# Altium PCB PCB5.PcbDoc (part 2 of 2)
Units mm, origin at the board's own origin, x right, y up, seen from the top; angles counter-clockwise.
Board outline 200 x 100 mm, 2 copper layers (Top Layer, Bottom Layer); 155 components, 119 nets, 507 pads, 129 vias.
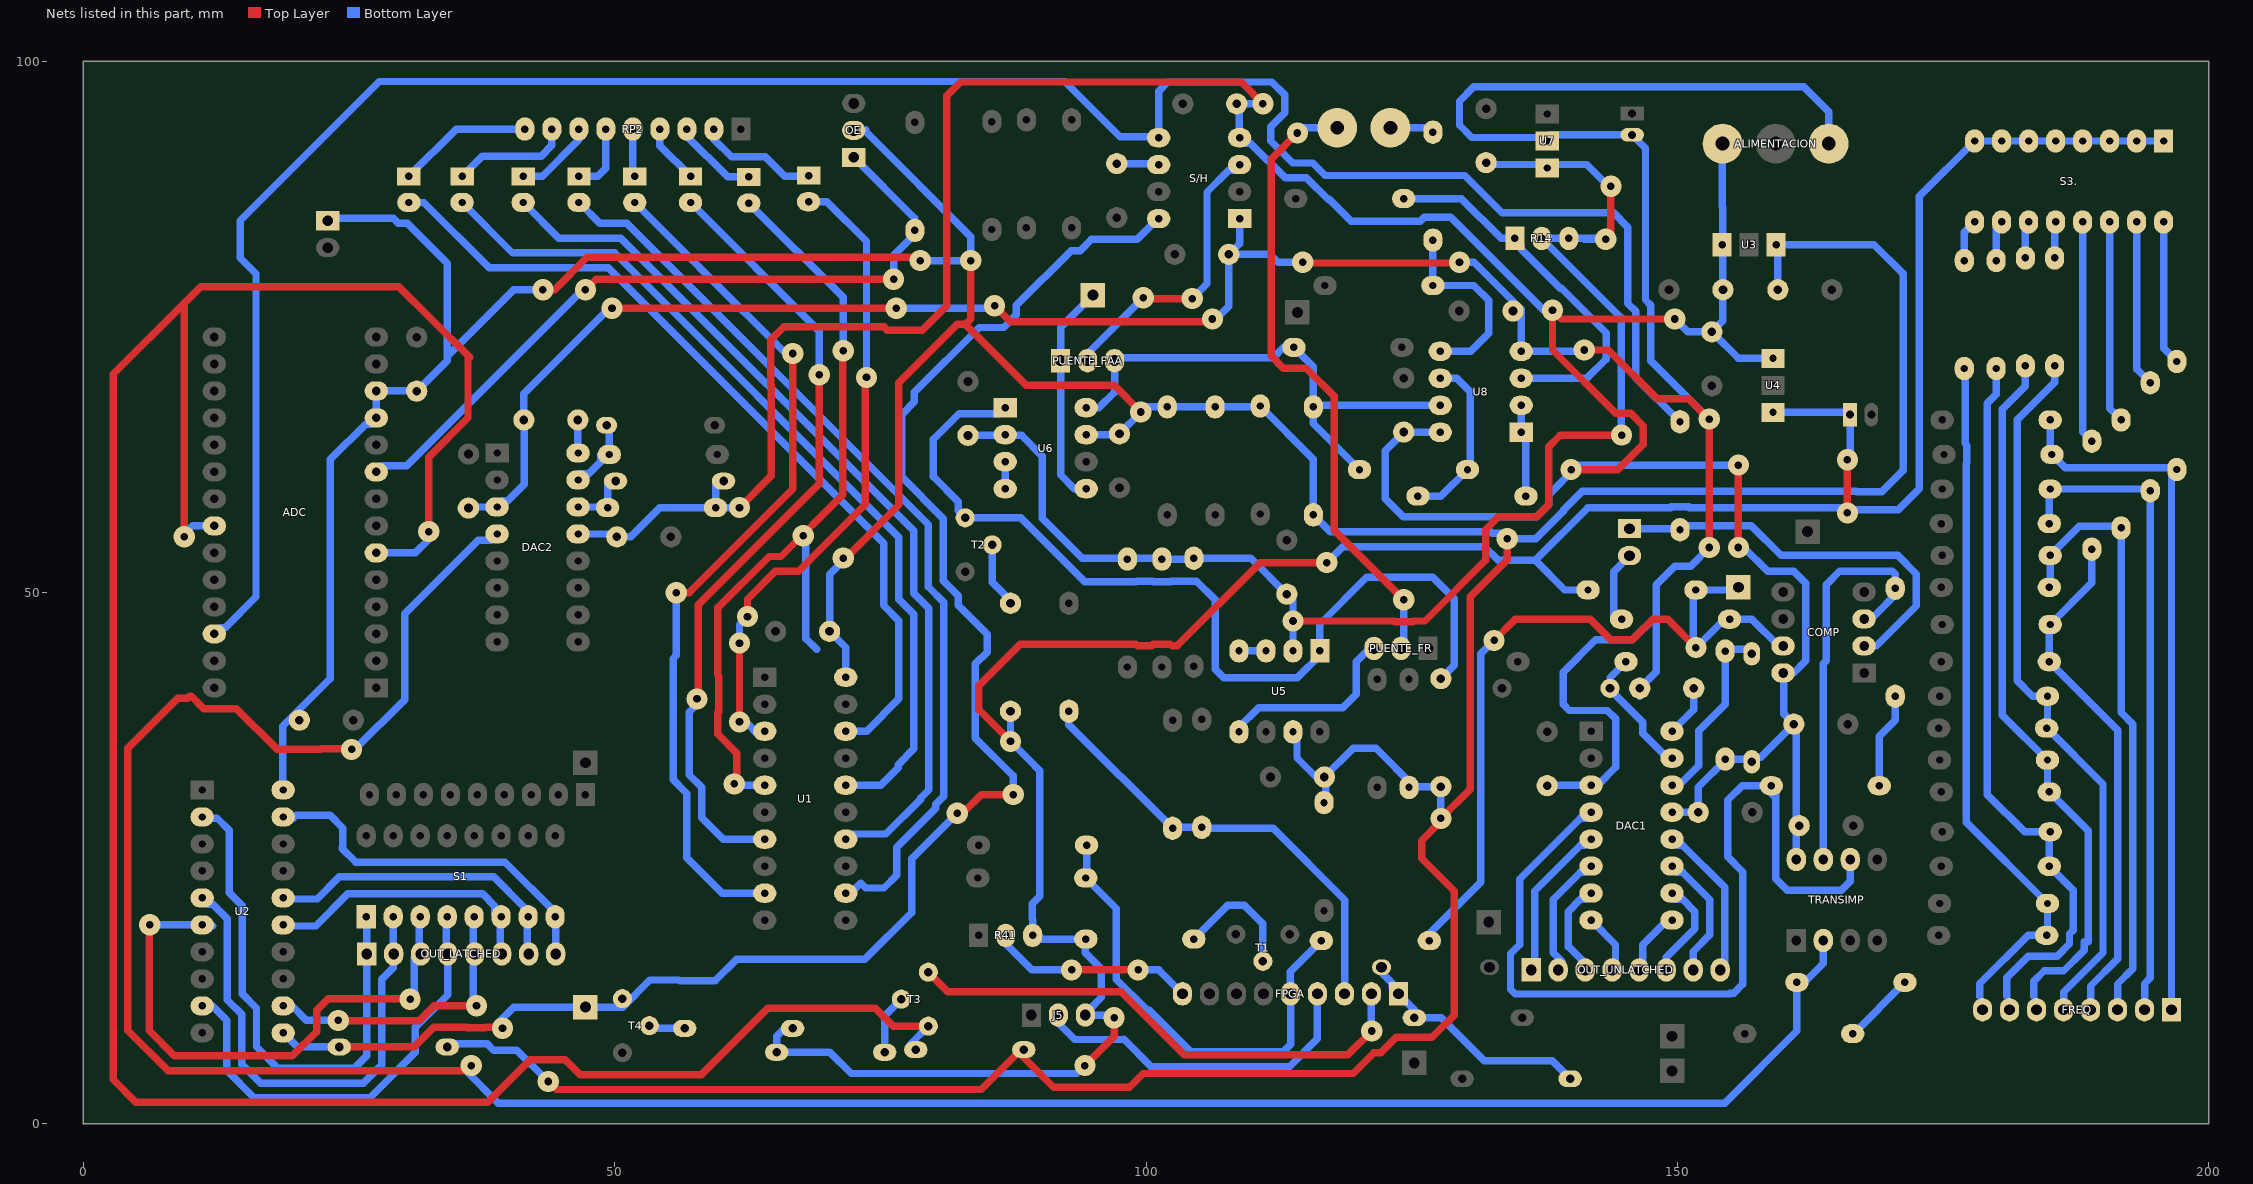
[diagram p2: the nets of this part, all layers, seen from the top]

## Via types
v1: diameter 2, hole 0.711, Top Layer to Bottom Layer, 127 vias
v2: diameter 5, hole 0.711, Top Layer to Bottom Layer, 2 vias

## Nets (pads, with @x,y where several pads share a name; then routed paths per layer and width w, separated by ;. In a path a pad name is that pad's centre, name@x,y a point inside that pad or via, vN(x,y) a via of type N, cw(c..) or ccw(c..) an arc to the next point about the centre after c; other vN are vias at no path point) (continued)
NetC4_2: C4.2 DAC1.16 | length 4.4
  Bottom Layer w0.7: DAC1.16@149.29,37.17 DAC1.16@149.5,36.96 151.54,39 C4.2@151.54,40.25
NetC8_1: C8.1 S/H.6 | length 3.9
  Bottom Layer w0.7: C8.1@97.25,90.37 97.27,90.35 S/H.6@101.19,90.35
NetC10_1: C10.1 DAC2.16 | length 3.1
  Bottom Layer w0.7: C10.1@46.54,66.25 46.54,63.16 DAC2.16@46.56,63.14
NetCOMP_2: COMP.2 R39.2 SCHMITT.1 | length 38.8
  Bottom Layer w0.7: SCHMITT.1@145.5,56.02 R39.2@150.15,56.02 ; R39.2@149.75,56.13 149.92,56.3 156.95,56.3 159.75,53.5 170.73,53.5 172.48,51.75 172.48,48.77 172.5,48.75 168.73,44.98 COMP.2@167.57,44.98
NetCOMP_3: COMP.3 R2.1 TRANSIMP.7 | length 39.8
  Bottom Layer w0.7: TRANSIMP.7@163.73,24.89 163.73,43.302 164.02,43.592 164.02,50.75 164,50.75 165.26,52.01 170.24,52.01 170.5,51.75 R2.1@170.5,50.41 171.08,50.41 171.08,50.372 168.228,47.52 COMP.3@167.57,47.52
NetD1_1: D1.1 U1.18 | length 79.5
  Bottom Layer w0.7: D1.1@30.643,86.714 32.036,86.714 38.186,80.564 49.416,80.564 75.33,54.65 75.33,48.791 76.75,47.371 76.75,40 73.707,36.957 U1.18@71.743,36.957
NetD1_2: D1.2 RP2.9 | length 12.8
  Bottom Layer w0.7: D1.2@30.643,89.178 35.088,93.623 RP2.9@41.553,93.623
NetD2_1: D2.1 U1.16 | length 82.6
  Bottom Layer w0.7: D2.1@35.643,86.714 40.393,81.964 49.996,81.964 76.73,55.23 76.73,49.371 78.15,47.951 78.15,35.3 76.673,33.823 76.673,33.528 75.022,31.877 U1.16@71.743,31.877
NetD2_2: D2.2 RP2.8 | length 11.2
  Bottom Layer w0.7: D2.2@35.643,89.178 37.543,91.078 43.078,91.078 44.093,92.093 RP2.8@44.093,93.623
NetD3_1: D3.1 U1.14 | length 84.6
  Bottom Layer w0.7: D3.1@41.393,86.714 44.743,83.364 50.576,83.364 78.13,55.81 78.13,49.951 79.55,48.531 79.55,31.429 78.8,30.679 78.8,30.575 75.512,27.287 71.743,27.287 U1.14@71.743,26.797
NetD3_2: D3.2 RP2.7 | length 7.7
  Bottom Layer w0.7: D3.2@41.393,89.178 43.208,89.178 46.633,92.603 RP2.7@46.633,93.623
NetD4_1: D4.1 U1.12 | length 86.7
  Bottom Layer w0.7: D4.1@46.643,86.714 48.593,84.764 51.156,84.764 79.53,56.39 79.53,50.531 80.95,49.111 80.95,30.849 80.2,30.099 80.2,29.7 76.543,26.043 76.543,23.408 75.342,22.207 73.644,22.207 73.175,22.675 72.217,21.717 U1.12@71.743,21.717
NetD4_2: D4.2 RP2.6 | length 6.5
  Bottom Layer w0.7: D4.2@46.643,89.178 48.428,89.178 49.173,89.923 RP2.6@49.173,93.623
NetD5_1: D5.1 U1.9 | length 83.4
  Top Layer w0.7: v1(55.8,50) 57,50 66.75,59.75 v1(66.75,72.5)
  Bottom Layer w0.7: D5.1@51.893,86.714 57.323,81.284 57.323,81.274 58.524,80.073 58.534,80.073 66.107,72.5 v1(66.75,72.5) ; v1(55.8,50) 55.8,44.101 55.5,43.801 55.5,32.399 56.8,31.099 56.8,25.051 60.134,21.717 U1.9@64.123,21.717 U1.9@64.123,21.127
NetD5_2: D5.2 RP2.5 | length 4.5
  Bottom Layer w0.7: RP2.5@51.713,93.623 51.713,89.358 D5.2@51.893,89.178
NetD6_1: D6.1 U1.7 | length 76
  Top Layer w0.7: v1(57.75,40) 57.85,40.1 57.85,48.85 69.25,60.25 v1(69.25,70.5)
  Bottom Layer w0.7: D6.1@57.143,86.714 69.25,74.607 v1(69.25,70.5) ; v1(57.75,40) 58.25,40 57,38.75 57,32.879 58.2,31.679 58.2,28.8 60.203,26.797 U1.7@64.123,26.797
NetD6_2: D6.2 RP2.4 | length 5.6
  Bottom Layer w0.7: RP2.4@54.253,93.623 54.253,92.068 D6.2@57.143,89.178
NetD7_1: D7.1 U1.5 | length 78.9
  Top Layer w0.7: v1@61.5,32 61.5,34.899 59.7,36.699 59.7,38.683 59.8,38.783 59.8,42.15 59.7,42.25 59.7,48.563 64.537,53.4 65.65,53.4 71.45,59.2 71.45,72.7 v1(71.5,72.75)
  Bottom Layer w0.7: v1(61.25,32) 61.373,31.877 U1.5@64.123,31.877 ; D7.1@62.393,86.654 D7.1@62.393,86.714 ; D7.1@62.623,86.654 71.5,77.777 v1(71.5,72.75) ; v1(67.75,55.346) 68,55.096 68,45.681 69,44.681
NetD7_2: D7.2 RP2.3 | length 8.1
  Bottom Layer w0.7: RP2.3@56.793,93.623 56.793,92.963 60.638,89.118 D7.2@62.623,89.118
NetD8_1: D8.1 U1.3 | length 61.6
  Top Layer w0.7: v1(61.75,37.834) v1(61.75,45.25) ; v1(62.5,47.75) 62.5,49.383 65.117,52 67.303,52 73.6,58.297 73.6,70.15 v1(73.7,70.25)
  Bottom Layer w0.7: v1(61.75,37.834) 62.332,37.834 63.666,36.5 U1.3@64.123,36.957 ; v1(61.75,45.25) 61.75,47 v1(62.5,47.75) ; D8.1@68.25,86.781 69.969,86.781 73.7,83.05 v1(73.7,70.25)
NetD8_2: D8.2 RP2.2 | length 11
  Bottom Layer w0.7: RP2.2@59.333,93.623 59.333,92.678 60.993,91.018 64.158,91.018 65.998,89.178 D8.2@67.893,89.178
NetD9_2: D9.2 D11.1 PUENTE_FAA.3 R1.2 U6.8 U8.7 | length 49.7
  Bottom Layer w0.7: U6.8@94.37,67.4 95.57,67.4 97.04,68.87 PUENTE_FAA.3@97.04,71.83 97.31,72.1 111.962,72.1 112.942,73.08 D9.2@113.92,73.08 115.75,71.25 D11.1@115.75,67.48 ; R1.2@120.09,61.58 115.75,65.92 D11.1@115.75,67.48 ; U8.7@127.69,67.63 115.9,67.63 D11.1@115.75,67.48
NetDAC1_4: DAC1.4 R3.2 TRANSIMP.6 | length 84
  Bottom Layer w0.7: DAC1.4@141.88,29.34 141.88,28.75 140.872,28.75 135.15,23.028 135.15,16.885 134.3,16.035 134.3,12.68 134.75,12.23 155,12.23 ; 154.925,12.305 155.305,12.305 156.17,13.17 156.17,23.71 154.75,25.13 154.75,30.49 156.09,31.83 158.09,31.83 159.24,30.68 ; R3.2@158.84,31.83 158.84,31.49 159.24,31.09 159.24,30.68 ; TRANSIMP.6@166.27,23.85 166.27,22.85 165.42,22 160.33,22 159.24,23.09 159.24,30.68
NetDAC1_5: DAC1.5 OUT_UNLATCHED.1 | length 14.9
  Bottom Layer w0.7: OUT_UNLATCHED.1@136.59,14.38 136.59,21.928 140.872,26.21 141.29,26.21 DAC1.5@141.88,26.8
NetDAC1_6: DAC1.6 OUT_UNLATCHED.2 | length 11.9
  Bottom Layer w0.7: OUT_UNLATCHED.2@139.13,14.38 139.13,15.325 138.33,16.125 138.33,21.128 140.872,23.67 141.29,23.67 DAC1.6@141.88,24.26
NetDAC1_7: DAC1.7 OUT_UNLATCHED.3 | length 9.3
  Bottom Layer w0.7: OUT_UNLATCHED.3@141.67,14.38 141.67,14.798 139.938,16.53 139.905,16.53 139.75,16.685 139.75,18.332 139.73,18.352 139.73,19.988 140.872,21.13 141.29,21.13 DAC1.7@141.88,21.72
NetDAC1_8: DAC1.8 OUT_UNLATCHED.4 | length 5.8
  Bottom Layer w0.7: DAC1.8@141.88,19.18 144.18,16.88 144.18,14.41 OUT_UNLATCHED.4@144.21,14.38
NetDAC1_9: DAC1.9 OUT_UNLATCHED.5 | length 6.2
  Bottom Layer w0.7: OUT_UNLATCHED.5@146.75,14.38 146.75,16.88 149.05,19.18 DAC1.9@149.5,19.18
NetDAC1_10: DAC1.10 OUT_UNLATCHED.6 | length 9.9
  Bottom Layer w0.7: OUT_UNLATCHED.6@148.95,14.5 148.95,15.672 151.65,18.372 151.65,19.988 150.508,21.13 149.5,21.13 DAC1.10@149.5,21.72 ; OUT_UNLATCHED.6@149.29,14.38 OUT_UNLATCHED.6@149.29,14.5
NetDAC1_11: DAC1.11 OUT_UNLATCHED.7 | length 12.1
  Bottom Layer w0.7: DAC1.11@149.5,24.26 150.09,23.67 150.508,23.67 153.05,21.128 153.05,17.792 151.49,16.232 OUT_UNLATCHED.7@151.49,14.5
NetDAC1_12: DAC1.12 OUT_UNLATCHED.8 | length 14.7
  Bottom Layer w0.7: DAC1.12@149.5,26.8 150.09,26.21 150.508,26.21 154.45,22.268 154.45,14.46 OUT_UNLATCHED.8@154.37,14.38
NetDAC1_14: DAC1.14 R4.1 R57.1 | length 17.6
  Bottom Layer w0.7: DAC1.14@149.5,31.88 150.15,31.88 152,33.73 152,37 154.5,39.5 R4.1@154.5,44.5 154.66,44.66 R57.1@157,44.66
NetDAC1_15: DAC1.15 R5.1 R56.1 | length 12.4
  Bottom Layer w0.7: R5.1@145.16,43.5 143.66,42 R56.1@143.66,41 144.155,40.505 144.155,40.405 146.75,37.811 146.75,36.75 149.08,34.42 DAC1.15@149.5,34.42
NetDAC2_4: DAC2.4 R12.1 TRANSIMP.2 | length 252.5
  Top Layer w0.7: v1(25.25,35.25) 25.2,35.3 22.401,35.3 22.351,35.25 18.25,35.25 14.41,39.09 11.325,39.09 10.183,40.232 10.002,40.232 9.82,40.05 8.901,40.05 4.2,35.349 4.2,8.8 8,5 v1@36.25,5
  Bottom Layer w0.7: v1@24.65,35.5 v1@24.9,35.25 ; v1(25.25,35.25) v1@24.9,35.25 ; v1@36.01,5 39.06,1.95 154.45,1.95 161.25,8.75 R12.1@161.25,13.33 161.96,13.33 163.73,15.1 TRANSIMP.2@163.73,17.27 ; DAC2.4@38.94,55.52 38.35,54.93 37.18,54.93 30.25,48 30.25,39.938 25.562,35.25 v1@24.9,35.25
  other v1: 36.5,5.5
NetDAC2_14: DAC2.14 R10.2 R55.2 | length 5.8
  Bottom Layer w0.7: DAC2.14@46.56,58.06 R10.2@49.34,58.06 ; R10.2@49.34,58 R10.2@49.34,58.06 ; R55.2@49.5,60.5 49.34,60.34 R10.2@49.34,58.06 ; R10.2@49.78,58.06 R10.2@49.34,58.06
NetDAC2_15: DAC2.15 R11.2 R54.2 | length 7.4
  Bottom Layer w0.7: DAC2.15@46.56,60.6 46.56,61.06 46.69,61.19 47.568,61.19 48.71,62.332 48.71,63 R11.2@49.5,63 49.5,65.5 R54.2@49.25,65.75
NetDZ2_2: DZ2.2 FREQ.5 R23.2 R28.2 | length 67.7
  Bottom Layer w0.7: DZ2.2@184.75,37.25 184.788,37.25 190.05,31.988 190.05,16.132 186.34,12.422 FREQ.5@186.34,10.75 ; DZ2.2@184.83,37.33 R28.2@184.83,40.25 183.42,40.25 181.97,41.7 181.97,66.25 185.5,69.78 R23.2@185.5,71.34
NetDZ3_2: DZ3.2 FREQ.2 R20.2 R29.2 | length 62.2
  Bottom Layer w0.7: DZ3.2@185,56.5 185,59.67 R29.2@185.08,59.67 ; R29.2@185.08,59.75 R20.2@195,59.75 ; FREQ.2@193.96,10.75 193.96,13.21 194.5,13.75 R20.2@194.5,59.59
NetDZ4_2: DZ4.2 FREQ.6 R24.2 R30.2 | length 66.7
  Bottom Layer w0.7: R24.2@182.75,71.34 182.75,69.43 180.57,67.25 180.57,38.472 184.792,34.25 R30.2@184.83,34.25 184.83,31.42 DZ4.2@185,31.25 188.65,27.6 188.65,17.15 ; 183.55,12 183.55,13.45 184.5,14.4 186.338,14.4 188.3,16.362 188.3,17.15
NetDZ5_2: DZ5.2 FREQ.3 R21.2 R31.2 | length 57.1
  Bottom Layer w0.7: DZ5.2@185.08,50.58 R31.2@185.08,53.5 187.82,56.24 R21.2@191.75,56.24 ; FREQ.3@191.42,10.75 191.42,13.17 192.85,14.6 192.85,37.63 191.75,38.73 R21.2@191.75,56.09
NetDZ6_2: DZ6.2 FREQ.7 R25.2 R32.2 | length 68.3
  Bottom Layer w0.7: R25.2@180,71.09 180,68.66 179.17,67.83 179.17,31 182.67,27.5 R32.2@185.08,27.5 ; 181.01,12 181.01,13.78 183.03,15.8 185.758,15.8 186.9,16.942 186.9,17.9 187.25,18.25 187.25,22 DZ6.2@185,24.25 R32.2@185,27.42
NetDZ7_2: DZ7.2 FREQ.4 R22.2 R33.2 | length 48.6
  Bottom Layer w0.7: R33.2@185,46.92 DZ7.2@185,43.5 191.45,37.05 191.45,15.553 188.88,12.983 FREQ.4@188.88,10.75 ; R33.2@185.08,47 189,50.92 R22.2@189,54.09
NetDZ8_2: DZ8.2 FREQ.1 R19.2 R27.2 | length 66.5
  Bottom Layer w0.7: R27.2@185.08,66.25 185.08,63.17 DZ8.2@185.25,63 186.5,61.75 R19.2@196.91,61.75 ; FREQ.1@196.5,10.75 196.5,61.09 R19.2@197,61.59
NetDZ9_2: DZ9.2 FREQ.8 R26.2 R34.2 | length 66
  Bottom Layer w0.7: R26.2@177,71.09 177.07,71.09 177.07,64.048 177.24,63.878 177.24,62.192 177.17,62.122 177.17,28.41 R34.2@184.83,20.75 DZ9.2@184.83,17.83 ; 178.47,12 178.47,13.22 183,17.75 DZ9.2@184.75,17.75
NetDZ12_2: DZ12.2 FPGA.3 R37.1 R38.2 | length 43.1
  Bottom Layer w0.7: R38.2@92.75,38.84 92.75,37.58 R37.1@102.5,27.83 ; R37.1@102.835,28.165 103.08,27.92 DZ12.2@105.25,27.92 ; DZ12.2@105.25,27.83 111.958,27.83 118.71,21.078 FPGA.3@118.71,11.83
NetDZ13_2: DZ13.2 FPGA.5 R42.2 R43.2 | length 45.4
  Bottom Layer w0.7: DZ13.2@94.33,23.15 97.2,20.28 97.2,13.599 100.099,10.7 100.3,10.7 104.2,6.8 112.92,6.8 113.63,7.51 113.63,13.37 ; DZ13.2@94.41,23.23 R43.2@94.41,26.25 ; FPGA.5@113.59,12.25 113.59,14.34 R42.2@116.5,17.25
NetDZ14_2: DZ14.2 FPGA.1 R50.1 R51.2 | length 23.1
  Bottom Layer w0.7: DZ14.2@122.17,14.75 122.17,14.248 123.16,13.258 123.16,12.84 FPGA.1@123.75,12.25 125.25,10.75 R50.1@125.25,10 127.77,10 131.82,5.95 138.21,5.95 R51.2@139.91,4.25
NetFOUT_1: FOUT.1 PUENTE_FAA.1 U6.5 | length 21.1
  Bottom Layer w0.7: U6.5@94.37,59.78 93.25,59.78 91.96,61.07 PUENTE_FAA.1@91.96,71.83 91.96,74.96 FOUT.1@95,78
NetFPGA_2: FPGA.2 T3.3 | length 48.8
  Top Layer w0.7: T3.3@79.52,14.29 81.36,12.45 97.651,12.45 103.601,6.5 119,6.5 v1(121.25,8.75)
  Bottom Layer w0.7: v1@121.21,9.29 FPGA.2@121.21,12.25
NetFPGA_4: FPGA.4 J5.2 | length 32.2
  Bottom Layer w0.7: J5.2@91.75,10.25 91.75,9.5 93.3,7.95 97.849,7.95 97.899,8 100.499,5.4 113.5,5.4 116.13,8.03 FPGA.4@116.13,12.25
NetFPGA_9: FPGA.9 R41.2 | length 19.4
  Top Layer w0.7: v1(93,14.5) v1(99.25,14.5)
  Bottom Layer w0.7: R41.2@86.79,17.75 86.79,16.96 89.25,14.5 v1(93,14.5) ; v1(99.25,14.5) 101.18,14.5 102.93,12.75 FPGA.9@103.43,12.25
NetIO_1: IO.1 R44.1 | length 4.2
  Bottom Layer w0.7: IO.1@123,93.75 126.58,93.75 R44.1@127,93.33
NetIO_2: IO.2 PUENTE_FR.2 | length 59.3
  Top Layer w0.7: v1(114.25,93.25) 111.77,90.77 111.77,72.272 112.912,71.13 115.058,71.13 117.7,68.488 117.7,55.88 v1(124.25,49.33)
  Bottom Layer w0.7: v1(114.25,93.25) 114.75,93.75 IO.2@118,93.75 ; PUENTE_FR.2@124.25,45.4 v1(124.25,49.33)
NetOUT_LATCHED_1: OUT_LATCHED.1 S1.1 U2.2 | length 49.1
  Bottom Layer w0.7: U2.2@12.163,28.79 12.581,28.79 13.733,27.638 13.733,24.58 13.75,24.563 13.75,21.758 14.963,20.545 14.963,12.247 16.3,10.91 16.3,7.25 18.3,5.25 25.5,5.25 26.673,6.423 26.673,19.95 S1.1@26.373,20.25
NetOUT_LATCHED_2: OUT_LATCHED.2 S1.2 U2.5 | length 46.7
  Bottom Layer w0.7: U2.5@11.19,21.27 11.78,20.68 12.198,20.68 13.563,19.315 13.563,11.667 14.9,10.33 14.9,5.633 16.683,3.85 26.35,3.85 28.073,5.573 28.073,13.623 29.163,14.713 S1.2@29.163,19.5 ; S1.2@28.95,19.5 28.95,19.627 S1.2@29.073,19.75
NetOUT_LATCHED_3: OUT_LATCHED.3 S1.3 U2.6 | length 53.5
  Top Layer w0.7: v1(6.25,18.75) 6.2,18.7 6.2,8.8 8.577,6.423 19.673,6.423 21.95,8.7 21.95,10.7 23.05,11.8 30.7,11.8 v1(30.75,11.75)
  Bottom Layer w0.7: v1(6.25,18.75) 12.043,18.75 U2.6@12.163,18.63 ; v1(30.75,11.75) 30.75,11.826 31.25,12.326 31.163,12.413 31.163,15.67 OUT_LATCHED.3@31.623,16.13 ; S1.3@31.613,19.75 31.613,16.14 OUT_LATCHED.3@31.623,16.13 ; OUT_LATCHED.3@31.753,16 OUT_LATCHED.3@31.623,16.13
NetOUT_LATCHED_4: OUT_LATCHED.4 S1.4 U2.9 | length 42.8
  Bottom Layer w0.7: U2.9@11.19,11.11 12.14,11.11 13.5,9.75 13.5,5.053 16.103,2.45 26.95,2.45 31.25,6.75 31.25,9.097 34.293,12.14 OUT_LATCHED.4@34.293,16 ; S1.4@33.873,20 34.153,19.72 OUT_LATCHED.4@34.153,16
NetOUT_LATCHED_5: OUT_LATCHED.5 S1.5 U2.12 | length 28.5
  Top Layer w0.7: v1(24,9.75) 24.05,9.7 31.599,9.7 33.026,11.127 v1(37,11.127)
  Bottom Layer w0.7: U2.12@18.81,11.11 19.64,11.11 21,9.75 v1(24,9.75) ; S1.5@36.693,20 36.693,11.32 36.75,11.377 v1(37,11.127)
NetOUT_LATCHED_6: OUT_LATCHED.6 S1.6 U2.15 | length 25.6
  Bottom Layer w0.7: U2.15@19.783,18.63 21.88,18.63 24.9,21.65 37.591,21.65 38.733,20.508 38.733,19.75 S1.6@39.073,19.75 ; S1.6@39.233,19.75 39.233,16.14 OUT_LATCHED.6@39.373,16
NetOUT_LATCHED_7: OUT_LATCHED.7 S1.7 U2.16 | length 29
  Bottom Layer w0.7: U2.16@19.783,21.17 22.023,21.17 24.103,23.25 38.623,23.25 41.613,20.26 S1.7@41.613,19.75 ; S1.7@41.763,19 S1.7@41.763,19.75 ; S1.7@41.773,19.75 41.773,16.14 OUT_LATCHED.7@41.913,16
NetOUT_LATCHED_8: OUT_LATCHED.8 S1.8 U2.19 | length 33.7
  Bottom Layer w0.7: U2.19@19.783,28.79 20.043,29.05 23.222,29.05 24.423,27.849 24.423,26.101 24.373,26.051 24.373,25.9 25.623,24.65 39.671,24.65 44.453,19.868 OUT_LATCHED.8@44.453,16
NetPUENTE_FR_3: PUENTE_FR.3 U5.5 | length 18.5
  Bottom Layer w0.7: U5.5@108.75,36.9 108.75,37.318 110.612,39.18 118.53,39.18 119.8,40.45 119.8,43.49 PUENTE_FR.3@121.71,45.4
NetR1_1: R1.1 R15.2 U8.6 | length 16.5
  Bottom Layer w0.7: R15.2@125.59,59.08 127.75,59.08 R1.1@130.25,61.58 130.5,61.83 130.5,68.9 129.23,70.17 U8.6@127.69,70.17
NetR2_2: R2.2 R3.1 | length 9
  Bottom Layer w0.7: R3.1@169,31.83 169,36.5 170.5,38 R2.2@170.5,40.25
NetR12_2: R12.2 R13.1 | length 6.9
  Bottom Layer w0.7: R13.1@166.5,8.5 166.58,8.5 R12.2@171.41,13.33
NetR14_1: R14.1 R16.1 U8.3 | length 35.8
  Bottom Layer w0.7: R16.1@124.25,86.9 124.43,87.08 129.67,87.08 133.42,83.33 R14.1@134.71,83.33 134.71,83.12 135.3,82.53 135.3,82.322 138.992,78.63 139.099,78.63 143.3,74.429 143.3,71.981 141.489,70.17 U8.3@135.31,70.17
NetR15_1: R15.1 U8.1 U8.2 | length 8.7
  Bottom Layer w0.7: U8.2@135.31,67.63 U8.1@135.31,65.09 135.75,64.65 R15.1@135.75,59.08
NetR17_1: R17.1 T1.1 | length 12.1
  Bottom Layer w0.7: R17.1@104.5,17.4 107.68,20.58 109.25,20.58 111,18.83 T1.1@111,15.31
NetR19_1: R19.1 S3..16 | length 13.6
  Bottom Layer w0.7: S3..16@195.75,84.88 195.75,73 R19.1@197,71.75
NetR20_1: R20.1 S3..15 | length 15.7
  Bottom Layer w0.7: S3..15@193.21,84.88 193.21,71.04 R20.1@194.5,69.75
NetR21_1: R21.1 S3..14 | length 19.1
  Bottom Layer w0.7: S3..14@190.67,84.88 190.67,67.33 R21.1@191.75,66.25
NetR22_1: R22.1 S3..13 | length 21
  Bottom Layer w0.7: S3..13@188.13,84.88 188.13,65.12 R22.1@189,64.25
NetR23_1: R23.1 S3..12 | length 3.3
  Bottom Layer w0.7: R23.1@185.5,81.5 S3..12@185.5,84.79
NetR24_1: R24.1 S3..11 | length 3.5
  Bottom Layer w0.7: R24.1@182.75,81.5 182.75,84.58 S3..11@183.05,84.88
NetR25_1: R25.1 S3..10 | length 3.8
  Bottom Layer w0.7: R25.1@180,81.25 180,84.37 S3..10@180.51,84.88
NetR26_1: R26.1 S3..9 | length 4
  Bottom Layer w0.7: R26.1@177,81.25 177,83.91 S3..9@177.97,84.88
NetR40_1: R40.1 SCHMITT.2 | length 6.5
  Bottom Layer w0.7: R40.1@144,47.58 144,51.98 SCHMITT.2@145.5,53.48
NetR44_2: R44.2 R45.1 U8.5 | length 18.5
  Bottom Layer w0.7: R44.2@127,83.17 R45.1@127,78.9 130.859,78.9 132.26,77.499 132.26,74.41 130.56,72.71 U8.5@127.69,72.71
NetR46_1: R46.1 T2.1 | length 6.7
  Bottom Layer w0.7: T2.1@85.52,54.5 85.52,50.98 R46.1@87.75,48.75
NetR47_2: R47.2 T2.2 U5.1 U6.1 | length 87.4
  Bottom Layer w0.7: U6.1@86.75,67.4 86.16,66.81 86.16,66.84 82.401,66.84 80,64.439 80,60.9 82.33,58.57 82.33,57.69 T2.2@82.98,57.04 88.21,57.04 94.24,51.01 99.058,51.01 99.128,51.08 100.622,51.08 100.692,51.01 102.308,51.01 102.378,51.08 104.75,51.08 106.5,49.33 106.5,42.81 107.33,41.98 114.248,41.98 116.37,44.102 U5.1@116.37,44.52 116.37,47.05 120.75,51.43 127,51.43 129,49.43 129,43.16 R47.2@127.75,41.91
NetR49_2: R49.2 T3.1 | length 5.9
  Bottom Layer w0.7: R49.2@75.41,6.5 R49.2@75.41,6.75 75.41,10.18 T3.1@76.98,11.75
NetR52_2: R52.2 T4.1 | length 3.4
  Bottom Layer w0.7: T4.1@53.27,9 56.34,9 R52.2@56.59,8.75
NetU5_3: U5.3 U5.4 | length 2.5
  Bottom Layer w0.7: U5.4@108.75,44.52 U5.3@111.29,44.52
NetU6_3: U6.3 U6.4 | length 2.5
  Bottom Layer w0.7: U6.4@86.75,59.78 U6.3@86.75,62.32
OE_ADC: ADC.9 OE.1 R9.2 | length 70.8
  Top Layer w0.7: v1(47.25,78.5) 48.25,79.5 v1(76.25,79.5)
  Bottom Layer w0.7: ADC.9@27.573,61.36 28.163,61.95 30.45,61.95 47,78.5 v1(47.25,78.5) ; OE.1@72.5,90.96 78.25,85.21 R9.2@78.25,84.09 ; v1(76.25,79.5) 76.25,81.75 R9.2@78.42,83.92
OUT_COMP: COMP.7 OUTCMP.1 R6.1 R40.2 R42.1 | length 74
  Top Layer w0.7: v1(132.75,45.5) 134.75,47.5 141.792,47.5 143.742,45.55 145.758,45.55 147.708,47.5 149.08,47.5 v1(151.75,44.83)
  Bottom Layer w0.7: R42.1@126.66,17 126.66,17.91 131.5,22.75 131.5,44.25 v1(132.75,45.5) ; R40.2@154.16,47.58 154.16,47.24 v1(151.75,44.83) 151.5,45.08 151.5,50 R6.1@151.75,50.25 155.5,50.25 OUTCMP.1@155.75,50.5 ; R40.2@154.25,47.22 154.16,47.13 R40.2@154.91,47.13 ; R40.2@154.91,47.5 157.012,47.5 159.532,44.98 COMP.7@159.95,44.98
SH_CONTROL: R53.2 S/H.8 SHCTRL.1 T4.2 U2.11 | length 155.5
  Top Layer w0.7: R53.2@23.59,7.25 31.152,7.25 32.989,9.087 36.14,9.087 36.151,9.077 37.849,9.077 37.86,9.087 39.363,9.087 v1(39.45,9) ; v1@83,29.5 84.5,31 v1(87.5,31)
  Bottom Layer w0.7: U2.11@18.81,8.57 20.13,7.25 R53.2@23.59,7.25 ; v1@39,9.5 40.5,11 50.75,11 53.3,13.55 56.099,13.55 56.149,13.5 59.477,13.5 61.477,15.5 73.545,15.5 77.943,19.898 77.943,24.943 v1(82.25,29.25) ; v1(87.5,31) 87.5,32.75 83.95,36.3 83.95,43.301 85.05,44.401 85.05,46.099 82.35,48.799 82.35,49.691 80.93,51.111 80.93,56.97 77,60.9 77,66.75 78.2,67.95 78.2,68.849 84.301,74.95 86.599,74.95 87.8,76.151 87.8,77.03 92.95,82.18 93.808,82.18 94.868,83.24 99.16,83.24 S/H.8@101.19,85.27
SH_IN: PUENTE_FAA.2 S/H.3 | length 27.5
  Top Layer w0.7: v1(99.75,77.75) 99.832,77.668 v1(104.35,77.668)
  Bottom Layer w0.7: PUENTE_FAA.2@94.5,71.83 94.5,72.5 v1(99.75,77.75) ; v1(104.35,77.668) 105.74,79.058 105.74,87.698 107.802,89.76 108.22,89.76 S/H.3@108.81,90.35
SH_OUT: ADC.26 R39.1 S/H.5 | length 214.8
  Bottom Layer w0.7: ADC.26@12.163,46.12 ADC.26@12.333,46.12 12.923,46.71 13.341,46.71 16.25,49.619 16.25,80 14.75,81.5 14.75,85 27.85,98.1 92.348,98.1 97.558,92.89 101.19,92.89 101.19,97.19 102.05,98.05 111.849,98.05 113.05,96.849 113.05,95.151 111.75,93.851 111.75,92.5 113.82,90.43 115.678,90.43 116.858,89.25 130,89.25 133.5,85.75 144,85.75 145.35,84.4 145.35,77.21 146.1,76.46 146.1,70.23 R39.1@150.25,66.08
START_FPGA: ADC.6 ADC.22 R48.2 T3.2 | length 241.9
  Top Layer w0.7: v1(9.5,55.25) 9.5,77.25 ; v1@32.5,55.25 v1(32.5,55.75) 32.5,62.75 36.2,66.45 36.2,72 36.35,72.15 32.75,75.75 29.7,78.8 11.05,78.8 9.5,77.25 ; T3.2@79.52,9.21 76.207,9.21 74.517,10.9 64.4,10.9 58.148,4.648 46.75,4.648 45.348,6.05 42.05,6.05 38.05,2.05 4.95,2.05 2.8,4.2 2.8,70.55 9.5,77.25
  Bottom Layer w0.7: v1@9.75,55.75 10.28,56.28 ADC.22@12.333,56.28 ; ADC.6@27.573,53.74 31.24,53.74 32.5,55 v1(32.5,55.75) ; R48.2@77.84,6.75 77.84,7.53 T3.2@79.52,9.21
VCC_3.3: C18.1 J5.3 R6.2 R17.2 R41.3 R46.2 R49.1 R52.1 S3..1 S3..2 S3..3 S3..4 S3..5 S3..6 S3..7 S3..8 U4.3 | length 257.2
  Top Layer w0.7: v1(87.25,36) 84.25,39 84.25,41.25 88.15,45.15 99.058,45.15 99.208,45 100.542,45 100.692,45.15 102.308,45.15 102.458,45 102.92,45 110.75,52.83 v1(117,52.83) ; v1(94.25,5.5) 97,8.25 v1(97,10) ; v1(166,57.5) v1(166,62.5)
  Bottom Layer w0.7: R52.1@66.75,9 66,9 65.25,8.25 R49.1@65.25,6.75 70.25,6.75 72.25,4.75 93.5,4.75 v1(94.25,5.5) ; R46.2@87.25,38.84 v1(87.25,36) 89,34.25 ; 89,34.25 90,33.25 90,21.42 89.29,20.71 89.29,19.25 89.33,19.21 R41.3@89.33,17.75 89.9,17.75 90.25,17.4 R17.2@94.34,17.4 94.29,17.35 94.29,16.109 95.8,14.599 95.8,11.901 94.599,10.7 J5.3@94.29,10.7 ; J5.3@94.29,10.25 96.75,10.25 v1(97,10) ; v1(117,52.83) 118.5,54.33 131.851,54.33 133.151,53.03 136.618,53.03 ; R6.2@141.59,50.25 139.398,50.25 136.618,53.03 ; U4.3@159,66.96 C18.1@166.04,66.96 ; v1(166,57.5) 166.3,57.8 170.8,57.8 172.77,59.77 172.77,87.3 S3..8@177.97,92.5 S3..7@180.51,92.5 S3..6@183.05,92.5 S3..5@185.59,92.5 S3..4@188.13,92.5 S3..3@190.67,92.5 S3..2@193.21,92.5 S3..1@195.75,92.5 ; v1@166,58 151.128,58 151.058,58.07 149.442,58.07 149.372,58 141.588,58 136.618,53.03 ; v1(166,62.5) 166.25,62.75 C18.1@166.25,66.75
VCC_5: ADC.11 ADC.12 C14.1 C16.1 C17.2 C24.1 C25.2 C26.1 D11.2 D12.2 D13.2 DZ10.2 FPGA_ALIM.1 OE.2 R18.2 R35.2 R47.1 R48.1 R53.1 U1.20 U2.20 U3.3 U5.7 U6.7 | length 508.9
  Top Layer w0.7: v1(43.25,78.5) 44.351,78.5 47.401,81.55 78.599,81.55 v1@79.149,81 ; v1(43.75,4) 44.502,3.248 84.498,3.248 88,6.75 91.3,3.45 98.45,3.45 99.75,4.75 119.5,4.75 121.45,6.7 122.099,6.7 123.562,8.163 126.913,8.163 129,10.25 129,21.921 125.94,24.981 125.94,26.679 127.75,28.489 v1(127.75,28.75) 130.5,31.5 130.5,49.6 134,53.1 v1(134,55.08) ; v1(71.5,53.25) 71.75,53.25 76.75,58.25 76.75,69.75 82.25,75.25 83,75.25 ; v1(83.5,81.25) 83.5,75.75 83,75.25 ; v1(99.5,67) 97,69.5 88.75,69.5 83,75.25
  Bottom Layer w0.7: 18.75,32.363 18.75,37.417 23.25,41.917 23.25,62.535 26.565,65.85 26.983,65.85 ADC.11@27.573,66.44 ADC.12@27.573,68.98 C24.1@31.353,68.98 ; FPGA_ALIM.1@23,85.25 29.149,85.25 29.635,84.764 30.486,84.764 34.25,81 34.25,72.25 ; C24.1@31.373,68.96 34.25,71.837 34.25,72.25 ; R53.1@33.75,7.25 33.75,7.52 33.78,7.55 38.001,7.55 38.601,6.95 40.8,6.95 v1(43.75,4) ; v1@44,78.5 v1(43.25,78.5) 40.5,78.5 34.25,72.25 ; v1(71.5,53.25) 71.5,53 70.223,51.723 C26.1@70.223,46.357 71.743,44.837 U1.20@71.743,42.037 ; 73.65,93.545 73.65,93.35 83.5,83.5 v1(83.5,81.25) v1(78.75,81.25) ; U6.7@94.37,64.86 C16.1@97.5,64.86 ; C16.1@97.5,64.94 v1@99.53,66.97 ; v1@100.04,67.48 D13.2@102,67.48 DZ10.2@106.5,67.48 110.67,67.48 R35.2@110.75,67.56 115.75,62.56 D11.2@115.75,57.32 117.34,55.73 132.431,55.73 132.581,55.58 133.5,55.58 v1(134,55.08) 136.688,55.08 139.3,57.692 139.3,57.8 141.05,59.55 166.849,59.55 166.899,59.5 169.25,59.5 171.25,61.5 171.25,80 168.5,82.75 U3.3@159.29,82.75 159.46,82.58 C14.1@159.46,78.5 ; U5.7@113.83,36.9 114.21,36.52 114.21,34.44 116,32.65 C17.2@116.79,32.65 ; R18.2@116.91,30.08 116.91,32.53 C17.2@116.79,32.65 ; v1(127.75,28.75) R47.1@127.75,31.75 125.25,31.75 121.64,35.36 119.5,35.36 C17.2@116.79,32.65
VCC_10: ALIMENTACION.3 C1.1 C3.2 C5.1 C7.1 C9.1 C11.2 C13.1 C15.1 COMP.8 DAC1.13 DAC2.13 R4.2 R10.1 R55.1 R57.2 S/H.4 TRANSIMP.8 U3.1 U4.1 U8.8 | length 319.5
  Top Layer w0.7: v1(61.75,58) 64.75,61 64.75,69.5 64.7,69.55 64.7,73.8 65.9,75 75.351,75 75.651,74.7 78.95,74.7 81.25,77 81.25,96.75 82.55,98.05 108.95,98.05 v1(111,96) ; v1(140,61.58) 144.399,61.58 146.8,63.981 146.8,65.679 145.599,66.88 144.2,66.88 138.25,72.83 v1(138.25,76.58) 139.08,75.75 v1(149.75,75.75) ; v1(155.75,54.25) v1(155.75,62)
  Bottom Layer w0.7: DAC2.13@46.56,55.52 C11.2@49.94,55.52 ; C11.2@50.21,55.25 51.5,55.25 54.25,58 R10.1@59.5,58 ; R55.1@59.66,60.5 59.5,60.34 R10.1@59.5,58 ; v1(61.75,58) R10.1@59.5,58 ; C7.1@108.54,96 C7.1@108.79,96 ; v1(111,96) C7.1@108.79,96 ; U8.8@127.67,65.11 C9.1@124.25,65.11 122.5,63.36 122.5,58.83 124.2,57.13 136.758,57.13 137.9,58.272 137.9,59.23 v1@140.35,61.68 ; v1(138.25,76.58) 137.42,76.58 128.68,85.32 126.192,85.32 125.802,84.93 119.32,84.93 117.25,87 117.128,87 115.098,89.03 113.088,89.03 109.818,92.3 109.4,92.3 108.81,92.89 108.79,92.91 C7.1@108.79,96 ; v1(140,61.58) 140.42,62 v1(155.75,62) ; DAC1.13@149.5,29.34 151.95,29.34 151.96,29.35 151.96,31.71 R4.2@154.59,34.34 ; v1(149.75,75.75) 150.96,74.54 C15.1@153.25,74.54 ; ALIMENTACION.3@154.21,92.25 154.21,86.33 154.29,86.25 C13.1@154.29,78.5 154.29,75.58 C15.1@153.25,74.54 ; R4.2@154.5,34.34 R4.2@154.59,34.34 ; v1(155.75,54.25) 156.25,54.25 158.49,52.01 160.958,52.01 162.1,50.868 162.1,43.6 160.94,42.44 COMP.8@160,42.44 ; U4.1@159,72.04 155.75,72.04 C15.1@153.25,74.54 ; COMP.8@159.95,42.44 COMP.8@160,42.44 ; C1.1@160.92,37.67 160,38.59 COMP.8@160,42.44 ; TRANSIMP.8@161.19,24.89 161.19,37.4 C1.1@160.96,37.63 157.83,34.5 157,34.5 156.84,34.34 R4.2@154.59,34.34
VEE_5: C19.1 C20.1 C23.1 D14.1 DZ11.1 R14.2 R14.3 R36.2 U5.2 U6.2 U7.3 | length 136.7
  Top Layer w0.7: v1(113.83,47.33) 123.351,47.33 123.401,47.28 125.099,47.28 125.149,47.33 126.25,47.33 131.95,53.03 131.95,55.929 133.151,57.13 134.849,57.13 136.758,57.13 137.9,58.272 137.9,63.73 139,64.83 v1(144.75,64.83) ; v1(143.25,83.25) 143.75,83.75 v1(143.75,88.25)
  Bottom Layer w0.7: C20.1@83.25,64.79 88.29,64.79 90.25,62.83 90.25,57 94.02,53.23 101.75,53.23 101.83,53.15 105.25,53.15 105.33,53.23 109.88,53.23 C19.1@113.25,49.86 113.83,49.28 v1(113.83,47.33) U5.2@113.83,44.52 ; C23.1@131.75,90.29 137.75,90.29 141.46,90.29 v1@143.625,88.125 ; R14.2@137,83.08 137.5,83.08 144.7,75.88 144.7,64.88 v1(144.75,64.83) v1@145.25,64.33 ; R14.2@137.25,83.33 R14.3@139.79,83.33 v1@143.17,83.33 ; 141.25,83.25 v1(143.25,83.25)
VEE_10: ALIMENTACION.1 C2.2 C4.1 C6.1 C10.2 C12.2 C21.1 C22.2 DAC1.3 DAC2.3 S/H.1 U7.2 U8.4 | length 298.4
  Top Layer w0.7: v1(49.75,76.75) 75.75,76.75 v1@76.25,76.25 ; v1(85.75,77) 87.25,75.5 105.5,75.5 105.75,75.75 v1(106.25,75.75) ; v1(114.75,81.08) 114.81,81.02 129.44,81.02 v1(129.5,81.08) v1@128.868,81.08 ; v1(141.25,72.83) 143.5,72.83 148.1,68.23 151.058,68.23 152.958,66.33 v1(153,66.33) 153,53.83 v1(153,54.25)
  Bottom Layer w0.7: C12.2@35.5,57.96 35.6,58.06 DAC2.3@38.94,58.06 39.53,58.65 39.948,58.65 41.5,60.202 41.5,66.29 C10.2@41.71,66.5 ; C10.2@41.46,66.25 41.46,68.71 49.5,76.75 v1(49.75,76.75) ; v1(76.5,76.75) v1@85.25,76.75 ; v1@106.75,75.9 107.8,76.95 107.8,81.82 C6.1@107.79,81.83 ; S/H.1@108.81,85.27 108.81,82.85 C6.1@107.79,81.83 ; v1(114.75,81.08) 112.42,81.08 111.67,81.83 C6.1@107.79,81.83 ; v1(129.5,81.08) 130.86,81.08 C21.1@135.29,76.65 ; C21.1@135.31,76.63 U8.4@135.31,72.71 141.13,72.71 v1(141.25,72.83) ; C2.2@137.75,31.84 137.79,31.88 DAC1.3@141.88,31.88 142.5,31.88 144.21,33.59 144.21,38.115 143.415,38.91 139.84,38.91 139.25,39.5 139.25,42.5 142.3,45.55 145.758,45.55 148,47.792 ; U7.2@137.75,92.83 130.67,92.83 129.5,94 129.5,96.25 130.84,97.59 161.91,97.59 164.25,95.25 ALIMENTACION.1@164.25,92.25 ; U7.2@138,93.08 C22.2@145.75,93.08 147,91.83 147,77.54 147.5,77.04 147.5,71.83 v1(153,66.33) ; C4.1@146.46,40.25 C4.1@146.46,41 148,42.54 148,47.792 ; v1(153,54.25) 151.25,52.5 149.75,52.5 148,50.75 148,47.792
pads on no net: COMP.5 COMP.6 S/H.2
copper on no net:
  other v2: 190,5.25 7.5,94.75

## Keep-outs
Keep-Out Layer:
  lines w0.1: 0,0 0,0 ; 0,0 0,100 200,100 200,0 0,0 ; 0,0 0,0

## Text inside footprints (layer, text, board x,y; h text height)
C18: Top Overlay "+" at 165.802,67.918 h1.02
C22: Top Overlay "+" at 146.918,95.528 h1.02 r270